# Altium PCB FPv1.3.2.PcbDoc (part 1 of 9)
Units mm, origin at the board's own origin, x right, y up, seen from the top; angles counter-clockwise.
Board outline 81.28 x 53.34 mm, 4 copper layers (Top Layer, GROUND PLANE, POWER PLANE, Bottom Layer); 98 components, 183 nets, 614 pads, 312 vias.
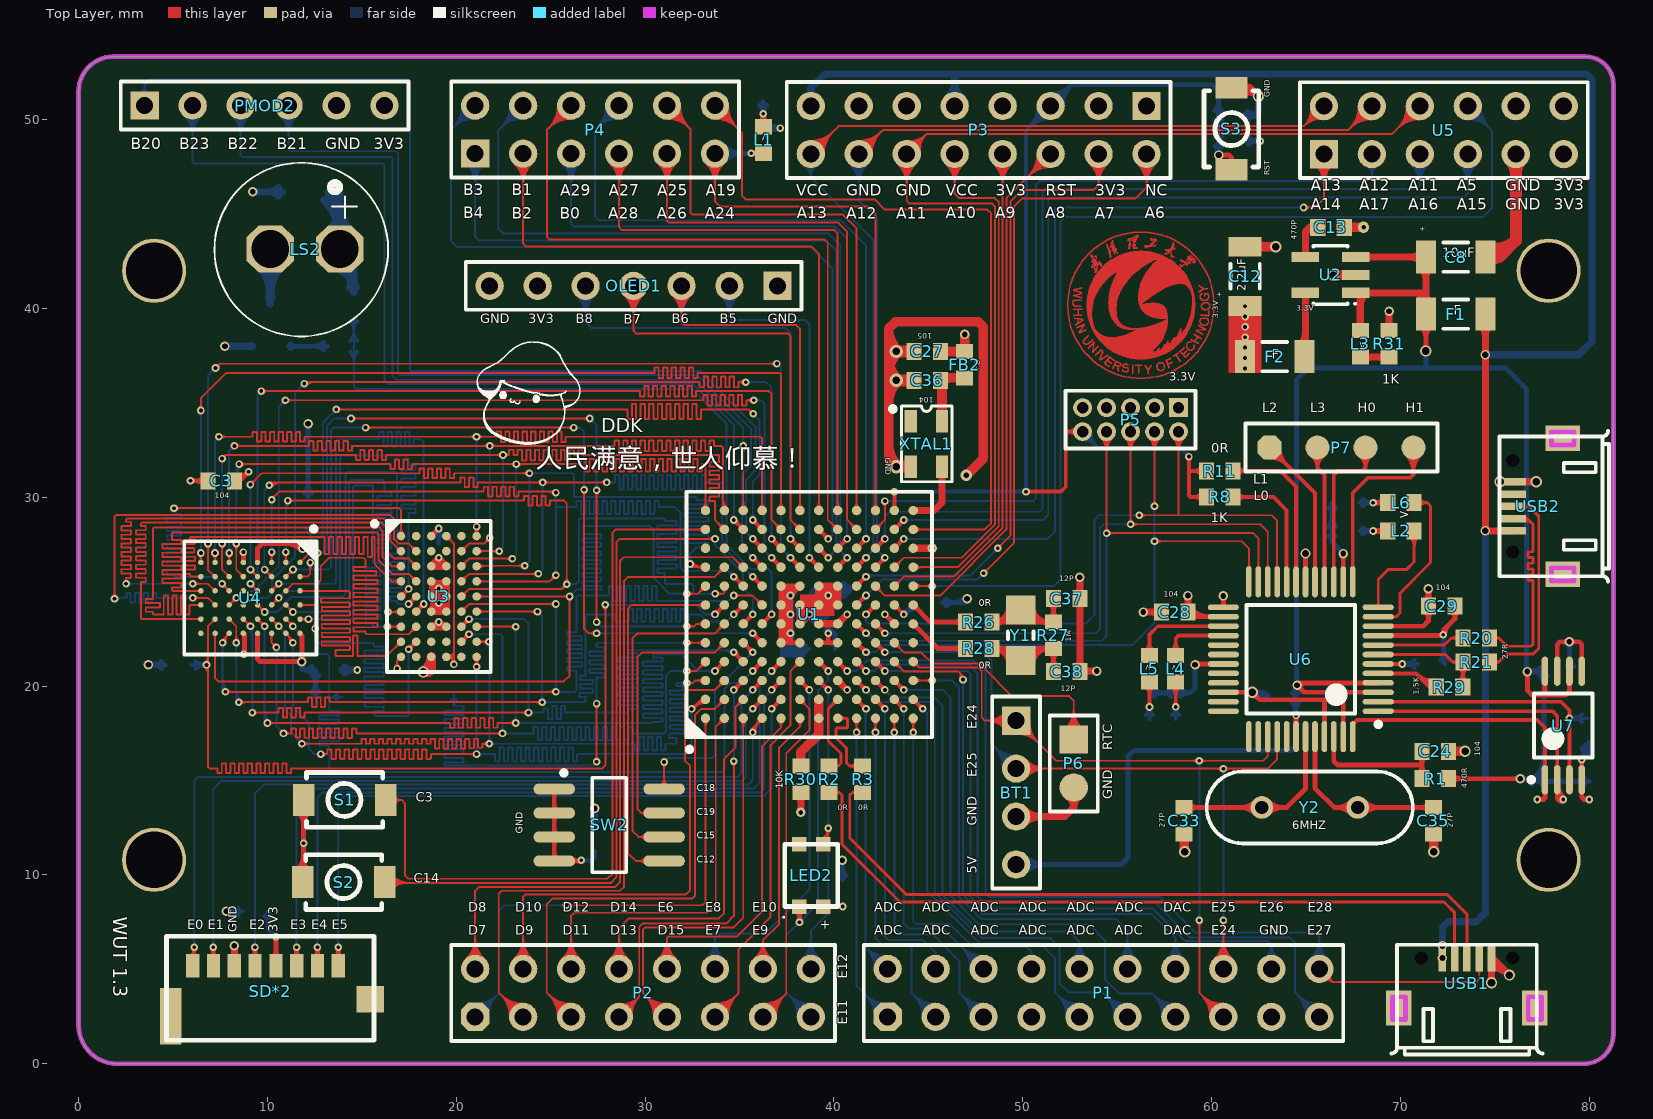
[diagram p0: Top Layer view]
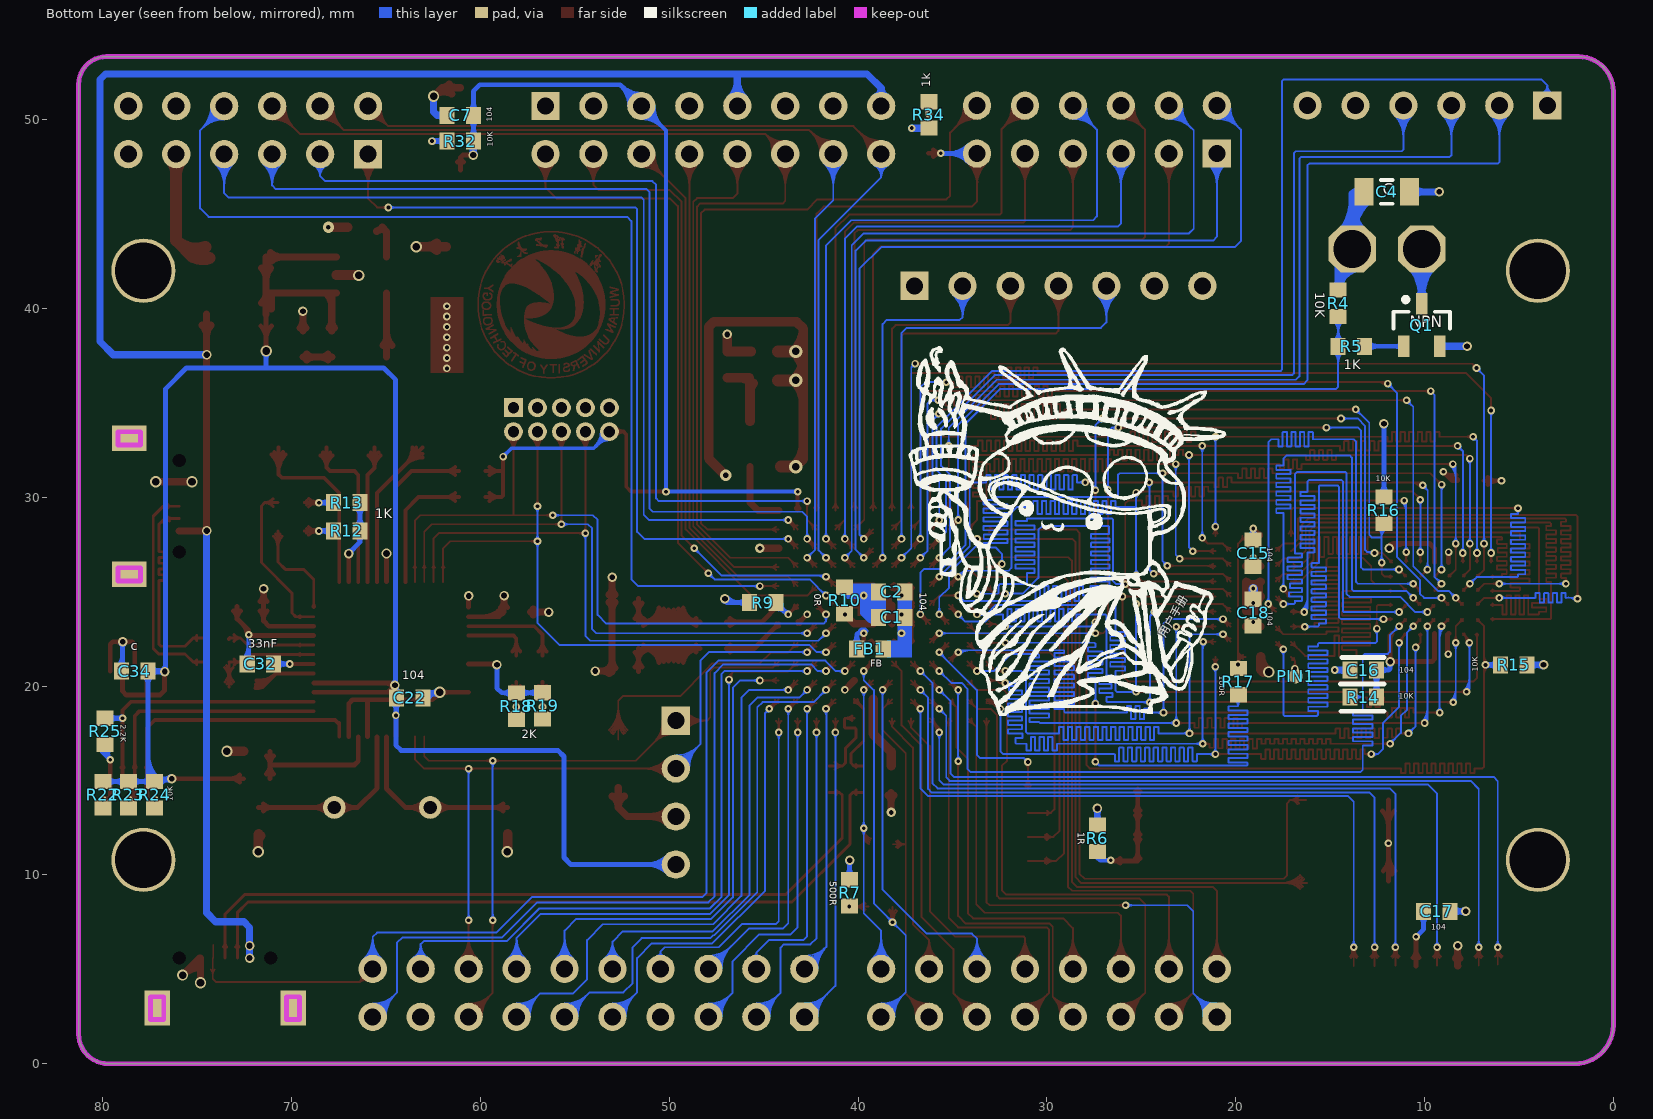
[diagram p1: Bottom Layer view, seen from below]
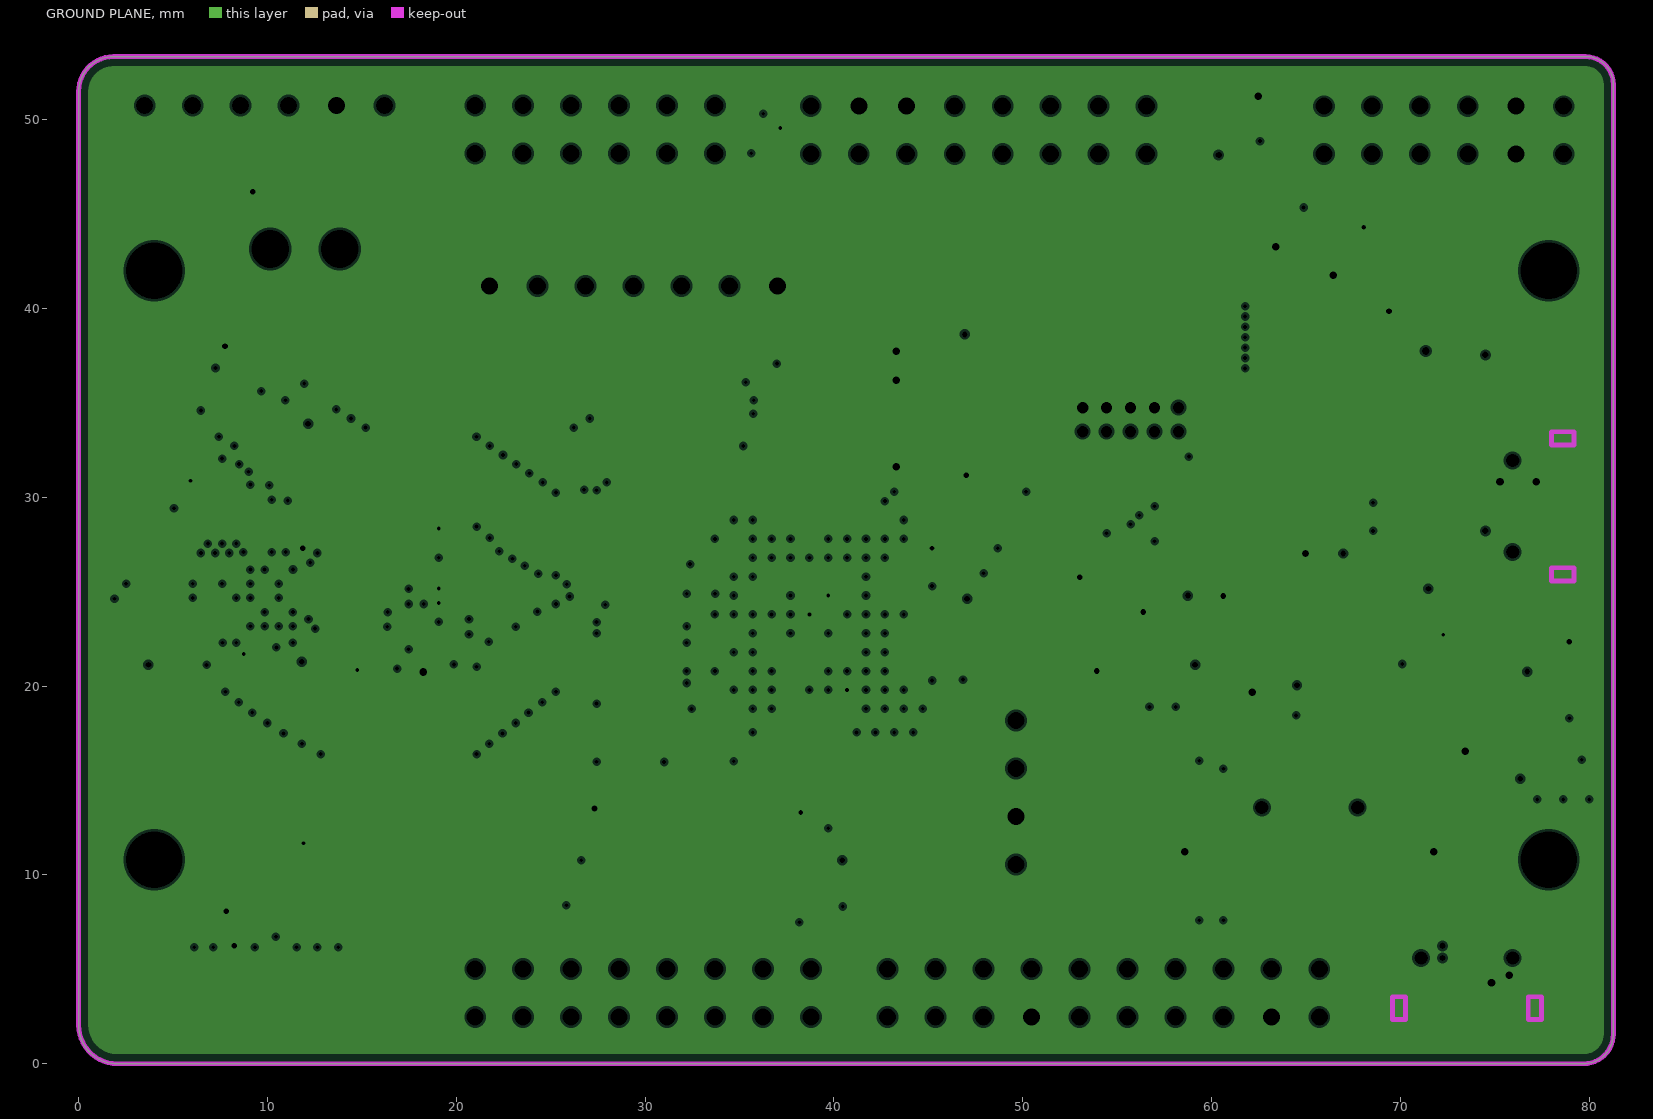
[diagram p2: GROUND PLANE, clearances drawn from the general rule]
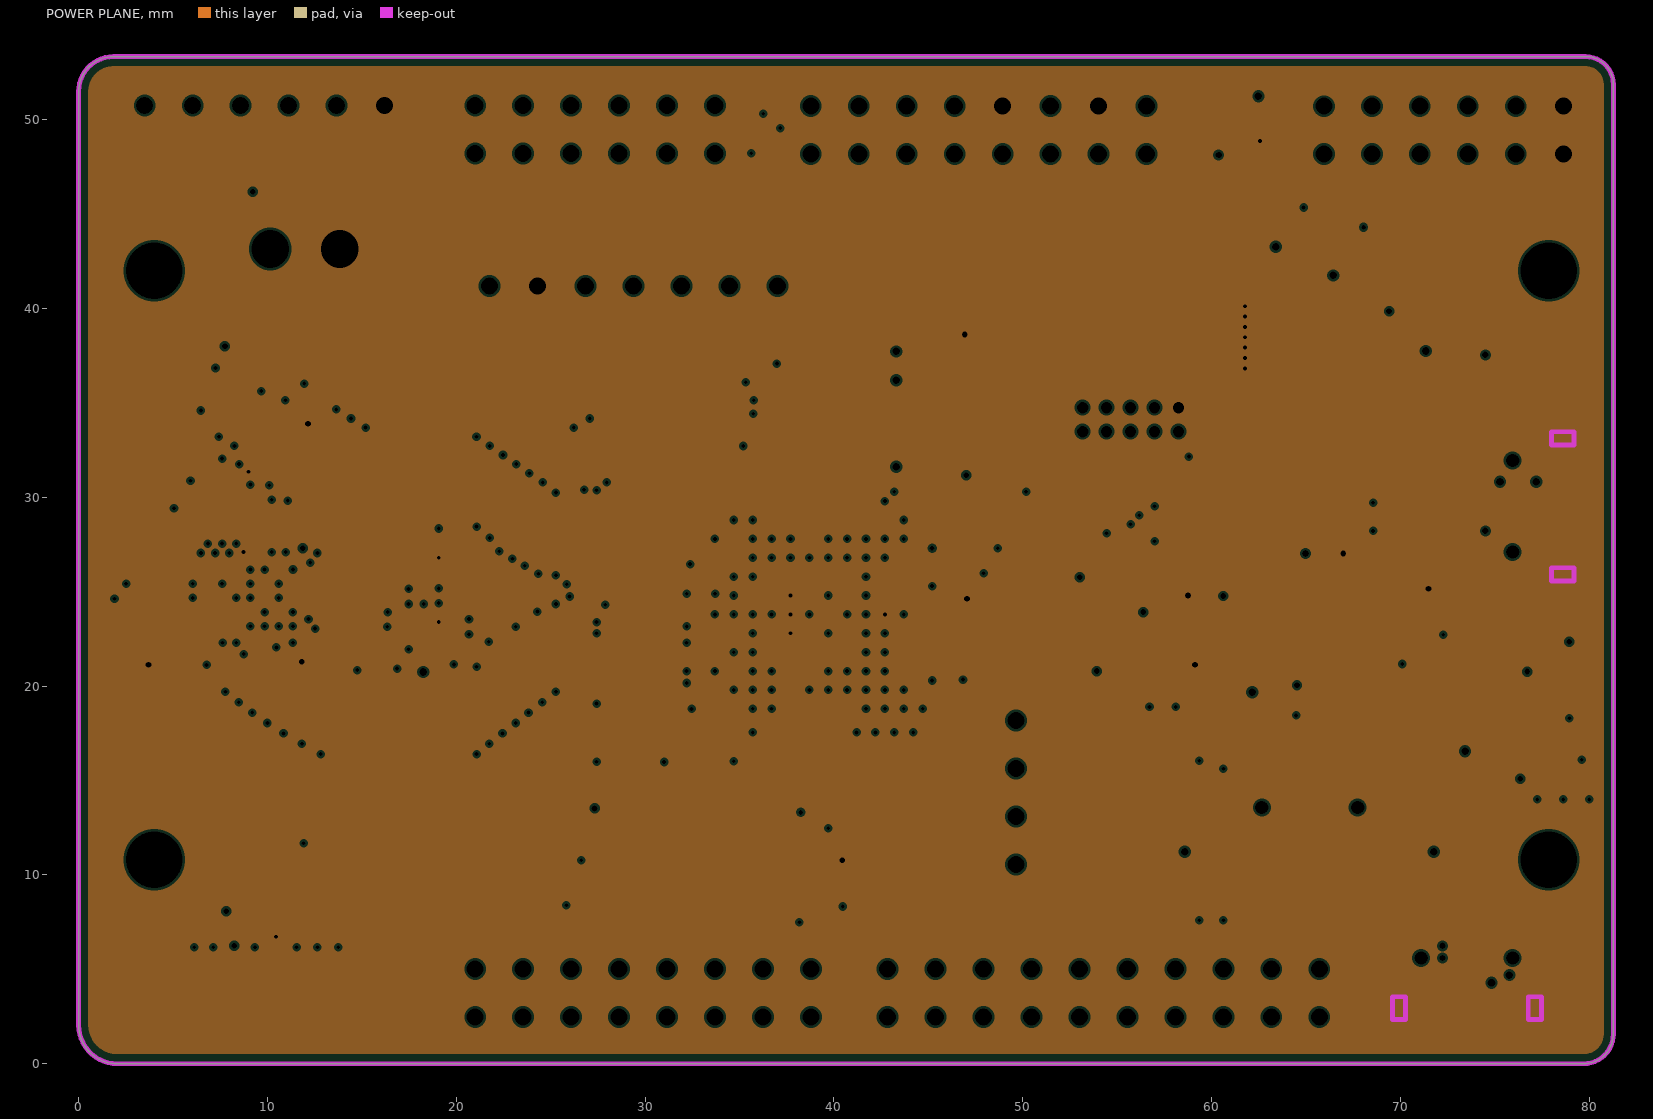
[diagram p3: POWER PLANE, clearances drawn from the general rule]

## Layer stack, top to bottom
Top Layer: signal copper 0.0356
Dielectric: prepreg 0.32, FR-4, Dk 4.8
GROUND PLANE: plane copper 0.0356, net GND
Dielectric: core 0.32, FR-4, Dk 4.8
POWER PLANE: plane copper 0.0356, net 3.3V
Dielectric: prepreg 0.32, FR-4, Dk 4.8
Bottom Layer: signal copper 0.0356

## Board outline
0,2.05 0,51.5 cw(c1.84,51.5) 1.84,53.34 79.81,53.34 cw(c79.81,51.87) 81.28,51.87 81.28,1.58 cw(c79.7,1.58) 79.7,0 2.05,0 cw(c2.05,2.05)

## Design rules (kind name [scope] priority, off if disabled: settings)
Clearance [All] p1: gap=0.102
DiffPairsRouting [All] p1: maxlimit=2.54 minlimit=0.102 mostfreqgap=0.254 bottomlayer_maxgap=1.27 maxuncoupledlength=12.7
HoleSize [All] p1: absolutevalues=TRUE maxlimit=12.7 minlimit=0.2 maxpercent=80.000 minpercent=20.000
PlaneClearance [All] p1: clearance=0.127
PlaneConnect PlaneConnect_1 [All] p1: planeconnectstyle=Direct reliefexpansion=0.102 reliefentries=4 reliefconductorwidth=0.152 reliefairgap=0.254
PolygonConnect [All] p1: connectstyle=Direct reliefconductorwidth=0.254 reliefentries=4 polygonreliefangle="90 Angle" airgapwidth=0.127
RoutingVias [All] p1: holewidth=0.711 width=1.27 viastyle="Through Hole" minholewidth=0.711 minwidth=1.27 maxholewidth=0.711 maxwidth=1.27
SolderMaskExpansion [All] p1: expansion=0.102
Width [All] p1: maxlimit=1.778 minlimit=0.102 preferedwidth=0.254 minimp=50.000000 maximp=50.000000 favimp=50.000000
24 further rules are at their usual default settings.

## Classes and differential pairs
net class PTC[19..12]: PTC3 PTC12 PTC13 PTC14 PTC15 PTC18 PTC19
net class PTD[15..7]: PTD7 PTD8 PTD9 PTD10 PTD11 PTD12 PTD13 PTD14 PTD15
net class PTB[23..0]: PTB0 PTB1 PTB2 PTB3 PTB4 PTB5 PTB6 PTB7 PTB8 PTB20 PTB21 PTB22 PTB23
net class PTA[29..11]: PTA4 PTA5 PTA11 PTA12 PTA13 PTA14 PTA15 PTA16 PTA17 PTA24 PTA25 PTA26 PTA27 PTA28 PTA29
net class FTM3_CH[7..1]: FTM3_CH1 FTM3_CH2 FTM3_CH3 FTM3_CH4 FTM3_CH5 FTM3_CH6 FTM3_CH7
net class ANALOG[13..1]: ANALOG1 ANALOG2 ANALOG3 ANALOG4 ANALOG5 ANALOG6 ANALOG7 ANALOG8 ANALOG9 ANALOG10 ANALOG11 ANALOG12 ANALOG13
from-to class SRAM_DATA: AD0(U1-B2:U4-B6) AD1(U1-A2:U4-C5) AD2(U1-A3:U4-C6) AD3(U1-B3:U4-D5) AD4(U1-C3:U4-E5) AD5(U1-C6:U4-F5) AD6(U1-D6:U4-F6) AD7(U1-A7:U4-G6) AD8(U1-B7:U4-B1) AD9(U1-C7:U4-C1) AD10(U1-D7:U4-C2) AD11(U1-A8:U4-D2) AD12(U1-C8:U4-E2) AD13(U1-D8:U4-F2) AD14(U1-B9:U4-F1) AD15(U1-D9:U4-G1) "AD16 (U1-E9 : U4-F4)" AD17(U1-B10:U4-E4) AD18(U1-C10:U4-D3) AD19(U1-D10:U4-H1) AD20(U1-E10:U4-G2)
component class MCU_K64FX: C1 C2 C3 C7 C27 C36 C37 C38 FB1 FB2 P5 P6 R9 R10 R26 R27 R28 R30 R32 S1 S2 S3 U1 XTAL1 Y1
component class Memory: C15 C16 C17 C18 PIN1 R14 R15 R16 R17 U3 U4
component class power_manage: C8 C12 C13 F1 F2 L3 R31 U2
component class protocol1: BT1 C4 L1 LED2 LS2 OLED1 P1 P2 P3 P4 PMOD2 Q1 R2 R3 R4 R5 R6 R7 R34 SD*2 SW2 U5 USB1
component class protocol2: C22 C24 C28 C29 C32 C33 C34 C35 L2 L4 L5 L6 P7 R1 R8 R11 R12 R13 R18 R19 R20 R21 R22 R23 R24 R25 R29 U6 U7 USB2 Y2
net class AD[20..0]: AD0 AD1 AD2 AD3 AD4 AD5 AD6 AD7 AD8 AD9 AD10 AD11 AD12 AD13 AD14 AD15 AD16 AD17 AD18 AD19 AD20
net class PTE[0..28]: PTE0 PTE1 PTE2 PTE3 PTE4 PTE5 PTE24 PTE25 PTE26 PTE27 PTE28
differential pair USB0D: +USB0D_P -USB0D_N
differential pair USB1D: +USB1D_P -USB1D_N
differential pair USBPD: +USBPD_P -USBPD_N
differential pair USB0R: +USB0R_P -USB0R_N

## Components (designator, comment, footprint, x,y, rotation, side; value= is the part's Value field where it differs from the comment)
BT1 "Header 4" HDR1X4#1 49.65,18.175 r270 top
C1 "Cap" 1608[0603] 38.227,23.647 r180 bottom
C2 "Cap" 1608[0603] 38.227,24.994 r180 bottom
C3 "Cap" 1608[0603] 7.55,30.875 r0 top
C4 "Cap" C2012 12,46.175 r0 bottom
C7 "Cap" 1608[0603] 61.075,50.225 r180 bottom
C8 "Cap Pol1" 1206(2) 72.925,42.725 r0 top
C12 "Cap Pol1" 1206(2) 61.775,41.7 r90 top
C13 "Cap" 1608[0603] 66.325,44.3 r180 top
C15 "Cap" 1608[0603] 19.075,27.05 r270 bottom
C16 "Cap" 1608[0603] 13.25,20.85 r180 bottom
C17 "Cap" 1608[0603] 9.35,8.075 r0 bottom
C18 "Cap" 1608[0603] 19.075,23.9 r270 bottom
C22 "Cap" 1608[0603] 63.75,19.375 r0 bottom
C24 "Cap" 1608[0603] 71.85,16.55 r0 top
C27 "Cap" 1608[0603] 44.95,37.725 r0 top
C28 "Cap" 1608[0603] 58.05,23.925 r0 top
C29 "Cap" 1608[0603] 72.187,24.236 r180 top
C32 "Cap" 1608[0603] 71.65,21.175 r0 bottom
C33 "Cap" 1608[0603] 58.55,12.875 r90 top
C34 "Cap" 1608[0603] 78.304,20.791 r180 bottom
C35 "Cap" 1608[0603] 71.75,12.875 r270 top
C36 "Cap" 1608[0603] 44.95,36.2 r0 top
C37 "Cap" 1608[0603] 52.325,24.64 r180 top
C38 "Cap" 1608[0603] 52.325,20.765 r180 top
F1 "300-500mA" 1206(2) 72.925,39.7 r180 top
F2 "300-500mA" 1206(2) 63.35,37.45 r180 top
FB1 "Inductor" 1608[0603] 39.37,21.971 r0 bottom
FB2 "Inductor" 1608[0603] 46.925,37.025 r270 top
L1 "LED" 1608[0603] 36.275,48.925 r90 top
L2 "LED" 1608[0603] 70.028,28.219 r0 top
L3 "LED" 1608[0603] 67.875,38.125 r270 top
L4 "LED" 1608[0603] 58.1,20.925 r90 top
L5 "LED" 1608[0603] 56.709,20.929 r90 top
L6 "LED" 1608[0603] 70.028,29.718 r0 top
LED2 "RGB_LED1206" RGB 38.8,9.975 r90 top
LS2 "Bell" BZ 11.8,43.15 r270 top
OLED1 "Header 7" HDR1X7 37.008,41.199 r180 top
P1 "Header 10X2" HDR2X10 42.845,2.485 r0 top
P2 "Header 8X2" HDR2X8#1 21.001,2.485 r0 top
P3 "Header 8X2" HDR2X8#2 56.556,50.725 r180 top
P4 "Header 6X2" HDR2X6 21.001,48.205 r0 top
P5 "JTAG" MHDR2X5 58.25,34.75 r180 top
P6 "Header 2" HDR1X2 52.7,17.175 r270 top
P7 "Header 4" HDR1X4#2 63.068,32.639 r0 top
PIN1 "PIN" PIN 16.815,20.523 r180 bottom
PMOD2 "Header 6" HDR1X6 3.5,50.75 r0 top
Q1 "QNPN" SOT23_N 10.15,39.125 r90 bottom
R1 "Res" 1608[0603] 71.85,15.1 r180 top
R2 "Res" 1608[0603] 39.75,15.075 r270 top
R3 "Res" 1608[0603] 41.525,15.075 r270 top
R4 "10k" 1608[0603] 14.575,40.275 r270 bottom
R5 "Res2" 1608[0603] 13.875,38 r0 bottom
R6 "Res2" 1608[0603] 27.325,11.95 r270 bottom
R7 "Res" 1608[0603] 40.45,9.05 r90 bottom
R8 "Res" 1608[0603] 60.427,30.023 r0 top
R9 "Res" 1608[0603] 45.05,24.425 r180 bottom
R10 "Res" 1608[0603] 40.716,24.536 r270 bottom
R11 "Res" 1608[0603] 60.427,31.394 r0 top
R12 "Res" 1608[0603] 67.081,28.219 r180 bottom
R13 "Res" 1608[0603] 67.081,29.718 r180 bottom
R14 "Res" 1608[0603] 13.25,19.425 r180 bottom
R15 "Res" 1608[0603] 5.275,21.125 r180 bottom
R16 "Res" 1608[0603] 12.15,29.325 r90 bottom
R17 "Res" 1608[0603] 19.863,20.244 r90 bottom
R18 "Res" 1608[0603] 58.1,18.947 r90 bottom
R19 "Res" 1608[0603] 56.709,18.951 r90 bottom
R20 "Res" 1608[0603] 74.025,22.55 r180 top
R21 "Res" 1608[0603] 74.025,21.275 r180 top
R22 "Res" 1608[0603] 80,14.25 r270 bottom
R23 "Res" 1608[0603] 78.65,14.25 r270 bottom
R24 "Res" 1608[0603] 77.25,14.25 r270 bottom
R25 "Res" 1608[0603] 79.875,17.6 r270 bottom
R26 "Res" 1608[0603] 47.679,23.392 r180 top
R27 "Res" 1608[0603] 51.625,22.69 r270 top
R28 "Res" 1608[0603] 47.679,21.995 r180 top
R29 "Res" 1608[0603] 72.6,19.95 r180 top
R30 "Res" 1608[0603] 38.25,15.075 r90 top
R31 "Res" 1608[0603] 69.4,38.125 r270 top
R32 "Res" 1608[0603] 61.069,48.864 r180 bottom
R34 "Res" 1608[0603] 36.25,50.25 r90 bottom
S1 "SW-PB" "key 3*4*2" 14.075,13.975 r180 top
S2 "SW-PB" "key 3*4*2" 14.025,9.625 r180 top
S3 "SW-PB" "key 3*4*2" 61.05,49.5 r270 top
SD*2 "TF_card" TF卡座(短体) 4.65,1.25 r0 top
SW2 "SW DIP-4" SOIC-8 28.1,12.65 r0 top
U1 "MK64BGA144" BGA144C100P12X12_1300X1300X161 38.7,23.8 r90 top
U2 "MIC5219" SOT-23-5 66.3,41.775 r90 top
U3 "SN74LVC16373A(BGA54)" BGA54C80P6X9_550X800X120 19.075,24.75 r0 top
U4 "EM7164SU16" BGA48C75P6X8_598X698X104 9.1,24.675 r270 top
U5 "Header 6X2" HDR2X6 65.95,48.175 r0 top
U6 "FT2232D" TSQFP50P900X900X160-48N 64.725,21.425 r180 top
U7 "AT93C46D" TSOP65P640X120-8N-AT93C46D 78.629,17.916 r90 top
USB1 "USB_5line" USB-MICRO-5P-2F#1 72.225,5.6 r180 top
USB2 "USB_5line" USB-MICRO-5P-2F#2 75.95,28.225 r270 top
XTAL1 "50M有源晶体" XTAL7_3225 44.9,32.825 r270 top
Y1 "32.768kHZ" 3215 49.9,22.69 r270 top
Y2 "6MHz" XTAL-RAD-0.2 65.2,13.575 r180 top

## Footprints (in the part's own frame and the unit in brackets; to place one, negate y for a bottom-side part, rotate by r counter-clockwise, add the part's x,y. Pads: shape width x height; smd on the part's side, far side on the other; paste and mask are expansions set on the pad)
1206(2) [mm]
  rect 1.05x1.75 smd: 1(-1.575,0) 2(1.575,0)
  silkscreen extent -0.65,-0.77 0.65,0.77, body extent -1.6,-0.8 1.6,0.8, height 1.6
1608[0603] [mm] "Chip Capacitor, Body 1.6x0.8mm, IPC High Density"
  rect 0.8x0.9 smd: 1(-0.7,0) 2(0.7,0)
  body extent -0.87,-0.48 0.87,0.48, height 1.3
3215 [mm]
  rect 1.54x1.55 smd: 1(-1.335,0) 2(1.335,0)
  silkscreen extent -0.2,-0.67 0.2,0.67, body extent -1.65,-0.75 1.65,0.75, height 0.75
BGA48C75P6X8_598X698X104 [mm] "BGA, 48-Leads, Body 5.98x6.98mmx1.04mm, Pitch 0.75mm"
  round 0.29 smd: A1(-1.875,2.625) A2(-1.125,2.625) A3(-0.375,2.625) A4(0.375,2.625) A5(1.125,2.625) A6(1.875,2.625) B1(-1.875,1.875) B2(-1.125,1.875) B3(-0.375,1.875) B4(0.375,1.875) B5(1.125,1.875) B6(1.875,1.875) C1(-1.875,1.125) C2(-1.125,1.125) C3(-0.375,1.125) C4(0.375,1.125) C5(1.125,1.125) C6(1.875,1.125) D1(-1.875,0.375) D2(-1.125,0.375) D3(-0.375,0.375) D4(0.375,0.375) D5(1.125,0.375) D6(1.875,0.375) E1(-1.875,-0.375) E2(-1.125,-0.375) E3(-0.375,-0.375) E4(0.375,-0.375) E5(1.125,-0.375) E6(1.875,-0.375) F1(-1.875,-1.125) F2(-1.125,-1.125) F3(-0.375,-1.125) F4(0.375,-1.125) F5(1.125,-1.125) F6(1.875,-1.125) G1(-1.875,-1.875) G2(-1.125,-1.875) G3(-0.375,-1.875) G4(0.375,-1.875) G5(1.125,-1.875) G6(1.875,-1.875) H1(-1.875,-2.625) H2(-1.125,-2.625) H3(-0.375,-2.625) H4(0.375,-2.625) H5(1.125,-2.625) H6(1.875,-2.625)
  silkscreen extent -3.77,-3.5 3,3.5, body extent -2.99,-3.49 2.99,3.49, height 1.04
BGA54C80P6X9_550X800X120 [mm] "BGA, 54-Leads, Body 5.50x8.00mmx1.20mm, Pitch 0.80mm"
  round 0.45 smd: A1(-2,3.2) A2(-1.2,3.2) A3(-0.4,3.2) A4(0.4,3.2) A5(1.2,3.2) A6(2,3.2) B1(-2,2.4) B2(-1.2,2.4) B3(-0.4,2.4) B4(0.4,2.4) B5(1.2,2.4) B6(2,2.4) C1(-2,1.6) C2(-1.2,1.6) C3(-0.4,1.6) C4(0.4,1.6) C5(1.2,1.6) C6(2,1.6) D1(-2,0.8) D2(-1.2,0.8) D3(-0.4,0.8) D4(0.4,0.8) D5(1.2,0.8) D6(2,0.8) E1(-2,0) E2(-1.2,0) E3(-0.4,0) E4(0.4,0) E5(1.2,0) E6(2,0) F1(-2,-0.8) F2(-1.2,-0.8) F3(-0.4,-0.8) F4(0.4,-0.8) F5(1.2,-0.8) F6(2,-0.8) G1(-2,-1.6) G2(-1.2,-1.6) G3(-0.4,-1.6) G4(0.4,-1.6) G5(1.2,-1.6) G6(2,-1.6) H1(-2,-2.4) H2(-1.2,-2.4) H3(-0.4,-2.4) H4(0.4,-2.4) H5(1.2,-2.4) H6(2,-2.4) J1(-2,-3.2) J2(-1.2,-3.2) J3(-0.4,-3.2) J4(0.4,-3.2) J5(1.2,-3.2) J6(2,-3.2)
  silkscreen extent -3.52,-4 2.75,4, body extent -2.75,-4 2.75,4, height 1.2
BGA144C100P12X12_1300X1300X161 [mm] "BGA, 144-Leads, Body 13.00x13.00mmx1.61mm, Pitch 1.00mm"
  round 0.5 smd: A1(-5.5,5.5) A2(-4.5,5.5) A3(-3.5,5.5) A4(-2.5,5.5) A5(-1.5,5.5) A6(-0.5,5.5) A7(0.5,5.5) A8(1.5,5.5) A9(2.5,5.5) A10(3.5,5.5) A11(4.5,5.5) A12(5.5,5.5) B1(-5.5,4.5) B2(-4.5,4.5) B3(-3.5,4.5) B4(-2.5,4.5) B5(-1.5,4.5) B6(-0.5,4.5) B7(0.5,4.5) B8(1.5,4.5) B9(2.5,4.5) B10(3.5,4.5) B11(4.5,4.5) B12(5.5,4.5) C1(-5.5,3.5) C2(-4.5,3.5) C3(-3.5,3.5) C4(-2.5,3.5) C5(-1.5,3.5) C6(-0.5,3.5) C7(0.5,3.5) C8(1.5,3.5) C9(2.5,3.5) C10(3.5,3.5) C11(4.5,3.5) C12(5.5,3.5) D1(-5.5,2.5) D2(-4.5,2.5) D3(-3.5,2.5) D4(-2.5,2.5) D5(-1.5,2.5) D6(-0.5,2.5) D7(0.5,2.5) D8(1.5,2.5) D9(2.5,2.5) D10(3.5,2.5) D11(4.5,2.5) D12(5.5,2.5) E1(-5.5,1.5) E2(-4.5,1.5) E3(-3.5,1.5) E4(-2.5,1.5) E5(-1.5,1.5) E6(-0.5,1.5) E7(0.5,1.5) E8(1.5,1.5) E9(2.5,1.5) E10(3.5,1.5) E11(4.5,1.5) E12(5.5,1.5) F1(-5.5,0.5) F2(-4.5,0.5) F3(-3.5,0.5) F4(-2.5,0.5) F5(-1.5,0.5) F6(-0.5,0.5) F7(0.5,0.5) F8(1.5,0.5) F9(2.5,0.5) F10(3.5,0.5) F11(4.5,0.5) F12(5.5,0.5) G1(-5.5,-0.5) G2(-4.5,-0.5) G3(-3.5,-0.5) G4(-2.5,-0.5) G5(-1.5,-0.5) G6(-0.5,-0.5) G7(0.5,-0.5) G8(1.5,-0.5) G9(2.5,-0.5) G10(3.5,-0.5) G11(4.5,-0.5) G12(5.5,-0.5) H1(-5.5,-1.5) H2(-4.5,-1.5) H3(-3.5,-1.5) H4(-2.5,-1.5) H5(-1.5,-1.5) H6(-0.5,-1.5) H7(0.5,-1.5) H8(1.5,-1.5) H9(2.5,-1.5) H10(3.5,-1.5) H11(4.5,-1.5) H12(5.5,-1.5) J1(-5.5,-2.5) J2(-4.5,-2.5) J3(-3.5,-2.5) J4(-2.5,-2.5) J5(-1.5,-2.5) J6(-0.5,-2.5) J7(0.5,-2.5) J8(1.5,-2.5) J9(2.5,-2.5) J10(3.5,-2.5) J11(4.5,-2.5) J12(5.5,-2.5) K1(-5.5,-3.5) K2(-4.5,-3.5) K3(-3.5,-3.5) K4(-2.5,-3.5) K5(-1.5,-3.5) K6(-0.5,-3.5) K7(0.5,-3.5) K8(1.5,-3.5) K9(2.5,-3.5) K10(3.5,-3.5) K11(4.5,-3.5) K12(5.5,-3.5) L1(-5.5,-4.5) L2(-4.5,-4.5) L3(-3.5,-4.5) L4(-2.5,-4.5) L5(-1.5,-4.5) L6(-0.5,-4.5) L7(0.5,-4.5) L8(1.5,-4.5) L9(2.5,-4.5) L10(3.5,-4.5) L11(4.5,-4.5) L12(5.5,-4.5) M1(-5.5,-5.5) M2(-4.5,-5.5) M3(-3.5,-5.5) M4(-2.5,-5.5) M5(-1.5,-5.5) M6(-0.5,-5.5) M7(0.5,-5.5) M8(1.5,-5.5) M9(2.5,-5.5) M10(3.5,-5.5) M11(4.5,-5.5) M12(5.5,-5.5)
  silkscreen extent -7.27,-6.5 6.5,6.5, body extent -6.5,-6.5 6.5,6.5, height 1.61
BZ [mm]
  oct 2.5x2.5 hole 2: 1(0,2.032) 2(0,-1.651)
  silkscreen extent -4.57,-4.61 4.62,4.59
C2012 [mm] "Chip Capacitor, 2-Leads, Body 2.0x1.2mm, IPC Low Density"
  rect 1x1.45 smd: 1(-1.2,0) 2(1.2,0)
  silkscreen extent -0.3,-0.63 0.3,0.63, body extent -0.98,-0.6 1.02,0.6, height 0.5
HDR1X2 [mm] "Connector; Header; 2 Position"
  rect 1.5x1.5 smd: 1(0,0)
  round 1.5 smd: 2(2.54,0)
  silkscreen extent -1.27,-1.27 3.81,1.27
HDR1X4#1 [mm] "Connector; Header; 4 Position"
  rect 1.5x1.5 hole 0.9: 1(0,0)
  round 1.5 hole 0.9: 2(2.54,0) 3(5.08,0) 4(7.62,0)
  silkscreen extent -1.27,-1.27 8.89,1.27
HDR1X4#2 [mm] "Connector; Header; 4 Position"
  oct 1.27x1.27 smd: 1(0,0)
  round 1.27 smd: 2(2.54,0) 3(5.08,0) 4(7.62,0)
  silkscreen extent -1.27,-1.27 8.89,1.27
HDR1X6 [mm] "Connector; Header; 6 Position"
  rect 1.5x1.5 hole 0.9: 1(0,0)
  round 1.5 hole 0.9: 2(2.54,0) 3(5.08,0) 4(7.62,0) 5(10.16,0) 6(12.7,0)
  silkscreen extent -1.27,-1.27 13.97,1.27, body extent -1.27,-1.27 13.97,1.27, height 7.58
HDR1X7 [mm] "Connector; Header; 7 Position"
  rect 1.5x1.5 hole 0.9: 1(0,0)
  round 1.5 hole 0.9: 2(2.54,0) 3(5.08,0) 4(7.62,0) 5(10.16,0) 6(12.7,0) 7(15.24,0)
  silkscreen extent -1.27,-1.27 16.51,1.27
HDR2X6 [mm] "Connector; Header; 6x2 Position"
  rect 1.5x1.5 hole 0.9: 1(0,0)
  round 1.5 hole 0.9: 2(0,2.54) 3(2.54,0) 4(2.54,2.54) 5(5.08,0) 6(5.08,2.54) 7(7.62,0) 8(7.62,2.54) 9(10.16,0) 10(10.16,2.54) 11(12.7,0) 12(12.7,2.54)
  silkscreen extent -1.27,-1.27 13.97,3.81, body extent -1.27,-1.27 13.97,3.81, height 7.58
HDR2X8#1 [mm] "Connector; Header; 8x2 Position"
  oct 1.5x1.5 hole 0.9: 1(0,0)
  round 1.5 hole 0.9: 2(0,2.54) 3(2.54,0) 4(2.54,2.54) 5(5.08,0) 6(5.08,2.54) 7(7.62,0) 8(7.62,2.54) 9(10.16,0) 10(10.16,2.54) 11(12.7,0) 12(12.7,2.54) 13(15.24,0) 14(15.24,2.54) 15(17.78,0) 16(17.78,2.54)
  silkscreen extent -1.27,-1.27 19.05,3.81, body extent -1.27,-1.27 19.05,3.81, height 7.58
HDR2X8#2 [mm] "Connector; Header; 8x2 Position"
  rect 1.5x1.5 hole 0.9: 1(0,0)
  round 1.5 hole 0.9: 2(0,2.54) 3(2.54,0) 4(2.54,2.54) 5(5.08,0) 6(5.08,2.54) 7(7.62,0) 8(7.62,2.54) 9(10.16,0) 10(10.16,2.54) 11(12.7,0) 12(12.7,2.54) 13(15.24,0) 14(15.24,2.54) 15(17.78,0) 16(17.78,2.54)
  silkscreen extent -1.27,-1.27 19.05,3.81, body extent -1.27,-1.27 19.05,3.81, height 7.58
HDR2X10 [mm] "Connector; Header; 10x2 Position"
  oct 1.5x1.5 hole 0.9: 1(0,0)
  round 1.5 hole 0.9: 2(0,2.54) 3(2.54,0) 4(2.54,2.54) 5(5.08,0) 6(5.08,2.54) 7(7.62,0) 8(7.62,2.54) 9(10.16,0) 10(10.16,2.54) 11(12.7,0) 12(12.7,2.54) 13(15.24,0) 14(15.24,2.54) 15(17.78,0) 16(17.78,2.54) 17(20.32,0) 18(20.32,2.54) 19(22.86,0) 20(22.86,2.54)
  silkscreen extent -1.27,-1.27 24.13,3.81, body extent -1.27,-1.27 24.13,3.81, height 7.58
"key 3*4*2" [mm]
  rect 1.15x1.7 smd: 1(-2.191,0) 2(2.159,0)
  silkscreen extent -2.03,-1.45 2,1.45
MHDR2X5 [mm] "Connector; Header; 5x2 Position"
  rect 1x1 hole 0.6: 1(0,0)
  round 1 hole 0.6: 2(0,1.27) 3(1.27,0) 4(1.27,1.27) 5(2.54,0) 6(2.54,1.27) 7(3.81,0) 8(3.81,1.27) 9(5.08,0) 10(5.08,1.27)
  silkscreen extent -0.9,-0.9 5.98,2.17
PIN [mil]
  round 30 smd: 1(0,0)
RGB [mil]
  rect 30x30 smd: 1(-65,25) 2(-65,-25) 3(65,-25) 4(65,25)
  silkscreen extent -90,-55 65,60
SOIC-8 [mm] "IOS1540\1"
  oval 2.2x0.6 smd: 1(-2.908,1.905) 2(-2.908,0.635) 3(-2.908,-0.635) 4(-2.908,-1.905) 5(2.908,-1.905) 6(2.908,-0.635) 7(2.908,0.635) 8(2.908,1.905)
  silkscreen extent -2.52,-2.5 0.9,2.88, body extent -2,-2.5 2,2.5, height 1.75
SOT23_N [mm] "SOT23, 3-Leads, Body 2.9x1.3mm, Pitch 0.95mm, Lead Span 2.3mm - Reverse Pinning, IPC Medium Density"
  rect 1.15x0.6 smd: 1(1.125,0) 2(-1.125,-0.95) 3(-1.125,0.95)
  silkscreen extent -0.2,-1.5 1.47,1.5, body extent -0.7,-1.5 0.7,1.5, height 1.1
SOT-23-5 [mm] "SOT-23/SC-74A; 5 Leads; Body 3.1 x 3 mm, inc. leads (LxW max)"
  rect 0.55x1.45 smd: 1(-0.95,-1.329) 2(0,-1.329) 3(0.95,-1.329) 4(0.95,1.329) 5(-0.95,1.329)
  silkscreen extent -1.57,-1.35 1.55,0.9
TF卡座(短体) [mm]
  rect 1.15x3 smd: 0(0.227,1.27)
  rect 1.48x1.4 smd: 0(10.795,2.159)
  rect 0.7x1.25 smd: 1(9.097,3.937) 2(7.997,3.937) 3(6.897,3.937) 4(5.797,3.937) 5(4.697,3.937) 6(3.597,3.937) 7(2.497,3.937) 8(1.397,3.937)
  silkscreen extent 0,0 11,5.5
TSOP65P640X120-8N-AT93C46D [mm] "TSOP, 8-Leads, Body 3.00x4.40mm, Pitch 0.65mm, IPC Medium Density"
  oval 1.55x0.35 smd: 1(-2.875,0.975) 2(-2.875,0.325) 3(-2.875,-0.325) 4(-2.875,-0.975) 5(2.875,-0.975) 6(2.875,-0.325) 7(2.875,0.325) 8(2.875,0.975)
  silkscreen extent -3,-1.55 1.7,1.82, body extent -2.25,-1.55 2.25,1.55, height 1.2
TSQFP50P900X900X160-48N [mm] "TSQFP, 48-Leads,FTDI FT2232D"
  oval 1.65x0.3 smd: 1(-4.1,2.75) 2(-4.1,2.25) 3(-4.1,1.75) 4(-4.1,1.25) 5(-4.1,0.75) 6(-4.1,0.25) 7(-4.1,-0.25) 8(-4.1,-0.75) 9(-4.1,-1.25) 10(-4.1,-1.75) 11(-4.1,-2.25) 12(-4.1,-2.75) 25(4.1,-2.75) 26(4.1,-2.25) 27(4.1,-1.75) 28(4.1,-1.25) 29(4.1,-0.75) 30(4.1,-0.25) 31(4.1,0.25) 32(4.1,0.75) 33(4.1,1.25) 34(4.1,1.75) 35(4.1,2.25) 36(4.1,2.75)
  oval 0.3x1.65 smd: 13(-2.75,-4.1) 14(-2.25,-4.1) 15(-1.75,-4.1) 16(-1.25,-4.1) 17(-0.75,-4.1) 18(-0.25,-4.1) 19(0.25,-4.1) 20(0.75,-4.1) 21(1.25,-4.1) 22(1.75,-4.1) 23(2.25,-4.1) 24(2.75,-4.1) 37(2.75,4.1) 38(2.25,4.1) 39(1.75,4.1) 40(1.25,4.1) 41(0.75,4.1) 42(0.25,4.1) 43(-0.25,4.1) 44(-0.75,4.1) 45(-1.25,4.1) 46(-1.75,4.1) 47(-2.25,4.1) 48(-2.75,4.1)
  silkscreen extent -4.23,-2.88 2.88,3.57, body extent -3.5,-3.5 3.5,3.5, height 1.6
USB-MICRO-5P-2F#1 [mm]
  round 0 hole 0.7: 0(-3.725,0) 0(1.125,0)
  rect 0.4x1.4 smd: 1(0,0) 2(-0.65,0) 3(-1.3,0) 4(-1.95,0) 5(-2.6,0)
  rect 1.35x1.85 all layers, no hole: 6(2.3,2.65) 7(-4.9,2.65)
  Keep-Out Layer lines w0.254: 2.65,3.25 2.65,2.05 1.95,2.05 1.95,3.25 2.65,3.25 ; -4.55,3.25 -5.25,3.25 -5.25,2.05 -4.55,2.05 -4.55,3.25
  silkscreen extent -5.3,-0.7 2.7,5.1
USB-MICRO-5P-2F#2 [mm]
  round 0 hole 0.7 mask+0.051: 0(-3.725,0) 0(1.125,0)
  rect 0.4x1.4 smd: 1(0,0) 2(-0.65,0) 3(-1.3,0) 4(-1.95,0) 5(-2.6,0)
  rect 1.35x1.85 all layers, no hole: 6(2.3,2.65) 7(-4.9,2.65)
  Keep-Out Layer lines w0.254: 2.65,2.05 2.65,3.25 1.95,3.25 1.95,2.05 2.65,2.05 ; -4.55,2.05 -5.25,2.05 -5.25,3.25 -4.55,3.25 -4.55,2.05
  silkscreen extent -5.3,-0.7 2.7,5.1
XTAL7_3225 [mil]
  rect 47.2x25.6 smd: 1(-47.25,-32.5) 2(47.25,-32.5) 3(47.25,32.5) 4(-47.25,32.5)
  silkscreen extent -79,-75 79,53
XTAL-RAD-0.2 [mm] "Radial Cap, Thru-Hole; 2 Leads; 0.2 in Pin Spacing"
  round 1.2 hole 0.7: 1(-2.54,0) 2(2.54,0)
  silkscreen extent -5.46,-1.91 5.46,1.91, body extent -5.33,-2.05 5.33,2.05, height 3.22

## Part data
BT1 P7: "Header, 4-Pin"
C1 C2 C3 C7 C13 C15 C16 C17 C18 C22 C24 C27 C28 C29 C32 C33 C34 C35 C36 C37 C38: "贴片电容"
C4: "Capacitor"
C8 C12: "Polarized Capacitor (Radial)"
F1 F2: library part "Fuse 1", "Fuse"
LS2: "Electrical Bell"
OLED1: "Header, 7-Pin"
P1: "Header, 10-Pin, Dual row"
P2 P3: "Header, 8-Pin, Dual row"
P4 U5: "Header, 6-Pin, Dual row"
P5: library part "Header 5X2", "Header, 5-Pin, Dual row"
P6: "Header, 2-Pin"
PMOD2: "Header, 6-Pin"
Q1: "NPN Bipolar Transistor"
R1 R2 R3 R7 R8 R9 R10 R11 R12 R13 R14 R15 R16 R17 R18 R19 R20 R21 R22 R23 R24 R25 R26 R27 R28 R29 R30 R31 R32 R34: "贴片电阻"
R4: library part Res, "Resistor of led"
R5 R6: "Resistor"
S1 S2 S3: "Switch"
SW2: "DIP Switch, 4 Position, SPST"
U2: "LDO"
XTAL1: library part 有源晶体
Y1 Y2: library part XTAL, "晶体振荡器"

## Free pads (board coordinates)
  round 3.4 hole 3: 0(77.85,10.8) 1(4,10.8) 2(4,42) 3(77.85,42)

## Via types
v1: diameter 0.403, hole 0.2, Top Layer to Bottom Layer, tented both sides, 261 vias
v2: diameter 0.503, hole 0.3, Top Layer to Bottom Layer, tented both sides, 25 vias
v3: diameter 0.6, hole 0.4, Top Layer to Bottom Layer, tented both sides, 11 vias
v4: diameter 0.508, hole 0.33, Top Layer to Bottom Layer, tented both sides, 5 vias
v5: diameter 0.703, hole 0.4, Top Layer to Bottom Layer, tented both sides, 3 vias
v6: diameter 0.603, hole 0.4, Top Layer to Bottom Layer, tented both sides, 2 vias
v7: diameter 0.503, hole 0.25, Top Layer to Bottom Layer, tented both sides, 2 vias
v8: diameter 0.6, hole 0.24, Top Layer to Bottom Layer, tented both sides, 1 vias
v9: diameter 0.508, hole 0.349, Top Layer to Bottom Layer, tented both sides, 1 vias
v10: diameter 0.603, hole 0.3, Top Layer to Bottom Layer, tented both sides, 1 vias

## Nets (pads, with @x,y where several pads share a name; then routed paths per layer and width w, separated by ;. In a path a pad name is that pad's centre, name@x,y a point inside that pad or via, vN(x,y) a via of type N, cw(c..) or ccw(c..) an arc to the next point about the centre after c; other vN are vias at no path point)
3.3V: C1.2 C2.2 C3.2 C4.2 C12.1 C15.2 C16.2 C17.2 C18.2 C27.2 C28.2 C29.2 F2.2 FB1.1 FB2.1 LS2.1 OLED1.6 P3.3 P3.7 P5.1 PMOD2.6 R4.1 R7.2 R9.1 R12.2 R13.2 R14.2 R15.2 R16.2 R18.2 R19.2 R32.1 SD*2.4 U1.E5 U1.E6 U1.E7 U1.E8 U1.F5 U1.F8 U1.L6 U3.C3 U3.C4 U3.G3 U3.G4 U4.A6 U4.D6 U4.E1 U5.11 U5.12 U6.10 U6.14 U6.26 U6.31 | length 134.5
  Top Layer w0.254: C3.2@8.25,30.875 8.525,30.875 v1(9,31.35) cw(c8.53,31.82) C3.2@8.331,31.186 ; C3.2@8.256,30.943 ccw(c8.389,31.368) 8.703,31.053 ; U4.E1@8.725,26.55 v1(8.725,27.1) ; U4.D6@9.475,22.8 9.475,21.425 9.6,21.3 v2(11.825,21.3) 11.825,22.7 U4.A6@11.725,22.8 ; SD*2.4@10.289,5.62 ccw(c9.909,6) 10.447,6 ccw(c10.985,6) SD*2.4@10.605,5.62 ; SD*2.4@10.447,5.187 v1@10.447,6.722 ; U4.A6@11.712,22.787 cw(c11.44,22.515) 11.825,22.515 ; v2@11.737,21.212 ccw(c11.524,20.999) 11.524,21.3 ccw(c11.524,21.601) 11.737,21.388 ccw(c11.524,21.601) 11.825,21.601 ccw(c12.126,21.601) v2@11.913,21.388 ; U1.E5@37.113,22.387 ccw(c36.903,22.597) 37.2,22.597 ccw(c37.497,22.597) 37.287,22.387 ccw(c37.497,22.597) 37.497,22.3 ccw(c37.497,22.003) U1.E5@37.287,22.213 ; U1.E6@37.113,23.213 cw(c36.903,23.003) 37.2,23.003 cw(c37.497,23.003) U1.E6@37.287,23.213 ; U1.E6@37.113,23.387 ccw(c36.903,23.597) 37.2,23.597 ccw(c37.497,23.597) U1.E6@37.287,23.387 ; U1.E7@37.113,24.213 cw(c36.903,24.003) 37.2,24.003 cw(c37.497,24.003) 37.287,24.213 cw(c37.497,24.003) 37.497,24.3 cw(c37.497,24.597) 37.287,24.387 cw(c37.497,24.597) 37.2,24.597 cw(c36.903,24.597) U1.E7@37.113,24.387 ; U1.E8@37.113,25.213 cw(c36.903,25.003) 37.2,25.003 cw(c37.497,25.003) 37.287,25.213 cw(c37.497,25.003) 37.497,25.3 cw(c37.497,25.597) U1.E8@37.287,25.387 ; U1.E5@37.2,22.423 ccw(c37.2,22.72) 37.41,22.51 ccw(c37.62,22.3) U1.E5@37.323,22.3 ; U1.E6@37.2,23.177 cw(c37.2,22.88) 37.41,23.09 cw(c37.62,23.3) 37.323,23.3 cw(c37.62,23.3) 37.41,23.51 cw(c37.2,23.72) U1.E6@37.2,23.423 ; U1.E7@37.2,24.177 cw(c37.2,23.88) 37.41,24.09 cw(c37.62,24.3) 37.323,24.3 cw(c37.62,24.3) 37.41,24.51 cw(c37.2,24.72) U1.E7@37.2,24.423 ; U1.E8@37.2,25.177 cw(c37.2,24.88) 37.41,25.09 cw(c37.62,25.3) U1.E8@37.323,25.3 ; 37.21,24.8 v1(37.7,24.8) ; 37.226,23.8 v1(37.7,23.8) ; 37.692,24.3 U1.E7@37.2,24.3 ; 37.7,22.306 v1(37.7,22.8) ; U1.F8@38.077,25.3 cw(c37.78,25.3) 37.99,25.09 cw(c38.2,24.88) U1.F8@38.2,25.177 ; U1.F5@38.113,22.213 ccw(c37.903,22.003) 37.903,22.3 ccw(c37.903,22.597) U1.F5@38.113,22.387 ; U1.F8@38.113,25.213 ccw(c37.903,25.003) 37.903,25.3 ccw(c37.903,25.597) U1.F8@38.113,25.387 ; U1.F5@38.2,22.3 U1.E5@37.2,22.3 ; v1(42.7,23.8) U1.L6@43.2,23.3 ; U1.L6@43.077,23.3 ccw(c42.78,23.3) 42.99,23.51 ccw(c43.2,23.72) U1.L6@43.2,23.423 ; C28.2@58.557,24.168 ccw(c58.091,24.634) 58.75,24.634 ccw(c59.409,24.634) C28.2@58.943,24.168 ; v2@58.642,24.738 cw(c58.255,24.514) 58.687,24.398 ; v2@58.662,24.712 cw(c58.449,24.499) 58.75,24.499 cw(c59.051,24.499) v2@58.838,24.712 ; C28.2@58.75,23.925 v2(58.75,24.8) ; C28.2@58.763,23.888 ccw(c59.279,24.404) 59.279,23.675 ; 58.813,24.398 cw(c59.245,24.514) v2@58.858,24.738 ; C28.2@58.943,24.068 ccw(c59.892,25.017) U6.26@59.892,23.675 ; C28.2@59,23.675 U6.26@60.625,23.675 ; v2(59.125,21.125) 59.175,21.175 U6.31@60.625,21.175 ; v2@59.213,21.037 cw(c59.546,20.704) 59.546,21.175 ; v2@66.887,26.937 cw(c66.674,26.724) 66.975,26.724 cw(c67.276,26.724) v2@67.063,26.937 ; U6.14@66.975,25.525 v2(66.975,27.025) ; U6.10@68.825,23.175 71.206,23.175 71.487,23.456 v2(71.487,25.161) ; C29.2@71.294,23.993 cw(c70.828,23.527) 71.487,23.527 cw(c72.146,23.527) C29.2@71.68,23.993 ; C29.2@71.294,24.479 ccw(c70.828,24.945) 71.487,24.945 ccw(c72.146,24.945) C29.2@71.68,24.479 ; v2@71.38,25.099 cw(c70.954,24.853) 71.429,24.726 ; v2@71.399,25.073 cw(c71.187,24.861) 71.487,24.861 cw(c71.788,24.861) v2@71.575,25.073 ; 71.546,24.726 cw(c72.021,24.853) v2@71.595,25.099 ; U1.E5@37.2,22.3 U1.E6@37.2,23.3 ; U1.E5@37.2,22.3 v1(37.7,22.8) ; U1.E6@37.2,23.3 v1(37.7,23.8) ; U1.E6@37.2,23.3 U1.E7@37.2,24.3 ; U1.E6@37.2,23.3 v1(37.7,22.8) ; U1.E7@37.2,24.3 U1.E8@37.2,25.3 ; U1.E7@37.2,24.3 v1(37.7,23.8) ; U1.E7@37.2,24.3 v1(37.7,24.8) ; U1.E8@37.2,25.3 v1(37.7,24.8) ; U1.E8@37.2,25.3 37.643,25.3 ; 37.643,25.3 37.7,25.243 v1(37.7,24.8) ; 37.643,25.3 U1.F8@38.2,25.3 v1(37.7,24.8) ; v1(37.7,22.8) v1(37.7,23.8) ; v1(37.7,23.8) v1(37.7,24.8)
  Top Layer w0.381: U3.G3@18.675,23.184 ccw(c18.675,23.63) v1@18.99,23.315 ; v1@19.065,23.404 cw(c18.675,23.576) U3.G3@18.675,23.15 U3.G3@18.825,23.15 ; 19.075,23.176 v1(19.075,23.4) ; 19.075,26.376 v1@19.075,26.75 ; v1(19.075,26.8) v1@19.075,26.75 ; v1@19.085,23.404 ccw(c19.475,23.576) U3.G4@19.475,23.15 U3.G4@19.325,23.15 ; v1@19.16,23.315 ccw(c19.475,23.63) U3.G4@19.475,23.184 ; F2.2@61.538,38.037 ccw(c60.967,38.608) 61.775,38.608 ccw(c62.583,38.608) F2.2@62.012,38.037 ; C12.1@61.538,39.888 cw(c60.967,39.317) 61.775,39.317 cw(c62.583,39.317) C12.1@62.012,39.888 ; v1@61.682,38.343 ccw(c62.041,38.216) F2.2@61.782,37.936 ; F2.2@61.768,37.936 ccw(c61.509,38.216) v1@61.868,38.343 ; F2.2@61.775,37.45 v1(61.775,40.125) ; U3.G3@18.825,23.15 U3.G4@19.325,23.15 ; U3.G3@18.825,23.15 v1(19.075,23.4) ; v1(19.075,23.4) U3.G4@19.325,23.15 ; v1@19.075,26.75 U3.C4@19.475,26.35 U3.C3@18.675,26.35 v1@19.075,26.75
  Top Layer w0.508: C27.2@45.65,37.725 FB2.1@46.925,37.725 v2(46.925,38.625)
  Bottom Layer w0.254: v2(3.7,21.125) R15.2@4.575,21.125 ; v2@3.762,21.017 cw(c4.008,20.592) 4.135,21.066 ; v2@3.762,21.233 ccw(c4.008,21.658) 4.135,21.184 ; v2@3.788,21.037 cw(c4.001,20.824) 4.001,21.125 cw(c4.001,21.426) v2@3.788,21.213 ; R15.2@4.382,20.932 ccw(c3.916,20.466) 3.916,21.125 ccw(c3.916,21.784) R15.2@4.382,21.318 ; C17.2@9.857,7.832 cw(c9.391,7.366) 10.05,7.366 cw(c10.709,7.366) C17.2@10.243,7.832 ; C17.2@10.05,8.075 10.05,7.125 v1(10.45,6.725) ; v2@11.737,21.212 cw(c11.524,20.999) 11.825,20.999 cw(c12.126,20.999) v2@11.913,21.212 ; v2(11.825,21.3) 11.825,20.925 11.9,20.85 ; R16.2@11.957,30.218 ccw(c11.491,30.684) 12.15,30.684 ccw(c12.809,30.684) R16.2@12.343,30.218 ; v2@12.062,33.812 cw(c11.849,33.599) 12.15,33.599 cw(c12.451,33.599) v2@12.238,33.812 ; R16.2@12.15,30.025 v2(12.15,33.9) ; C16.2@12.355,20.659 ccw(c11.9,20.213) 11.9,20.85 ; C16.2@12.355,21.041 cw(c11.9,21.487) 11.9,20.85 ; R14.2@12.357,19.668 ccw(c11.891,20.134) 12.55,20.134 ccw(c13.209,20.134) R14.2@12.743,19.668 ; C16.2@12.357,20.607 cw(c11.891,20.141) 12.55,20.141 cw(c13.209,20.141) C16.2@12.743,20.607 ; R14.2@12.55,19.425 C16.2@12.55,20.85 11.9,20.85 ; v1(37.7,22.8) 37.7,22.142 37.871,21.971 FB1.1@38.67,21.971 ; FB1.1@38.477,21.778 ccw(c38.011,21.312) 38.011,21.971 ccw(c38.011,22.63) FB1.1@38.477,22.164 ; R7.2@40.257,9.943 ccw(c39.791,10.409) 40.45,10.409 ccw(c41.109,10.409) R7.2@40.643,9.943 ; v2@40.362,10.687 cw(c40.149,10.474) 40.45,10.474 cw(c40.751,10.474) v2@40.538,10.687 ; R7.2@40.45,9.75 v2(40.45,10.775) ; R9.1@45.75,24.425 46.85,24.425 v2(47.05,24.625) ; R9.1@45.943,24.232 cw(c46.409,23.766) 46.409,24.425 cw(c46.409,25.084) R9.1@45.943,24.618 ; 46.267,24.425 ccw(c46.267,25.408) v2@46.962,24.713 ; 46.88,24.425 ccw(c46.88,24.795) v2@47.142,24.533 ; R19.2@56.709,19.651 58.096,19.651 R18.2@58.1,19.647 58.872,19.647 59.125,19.9 v2(59.125,21.125) ; R19.2@56.952,19.458 cw(c57.418,18.992) 57.418,19.651 cw(c57.418,20.31) R19.2@56.952,19.844 ; 57.381,19.651 cw(c57.381,18.978) R18.2@57.857,19.454 ; 57.401,19.651 ccw(c57.401,20.296) R18.2@57.857,19.84 ; R18.2@58.343,19.454 cw(c58.809,18.988) 58.809,19.647 cw(c58.809,20.306) R18.2@58.343,19.84 ; v2@59.037,21.037 cw(c58.824,20.824) 59.125,20.824 cw(c59.426,20.824) v2@59.213,21.037 ; R32.1@61.769,48.864 v1(62.566,48.864) ; R32.1@61.962,48.671 cw(c62.428,48.205) 62.428,48.864 cw(c62.428,49.523) R32.1@61.962,49.057 ; 62.3,48.83 cw(c62.378,48.538) v1@62.529,48.799 ; 62.3,48.898 ccw(c62.378,49.19) v1@62.529,48.929 ; R12.2@66.188,28.462 ccw(c65.722,28.928) 66.381,28.928 ccw(c67.04,28.928) R12.2@66.574,28.462 ; R13.2@66.188,29.475 cw(c65.722,29.009) 66.381,29.009 cw(c67.04,29.009) R13.2@66.574,29.475 ; R12.2@66.216,27.952 cw(c65.962,27.619) 66.381,27.619 ; R13.2@66.381,29.718 R12.2@66.381,28.219 66.381,27.619 ; R12.2@66.547,27.952 ccw(c66.8,27.619) 66.381,27.619 ; v2@66.851,27.025 ccw(c66.55,27.025) 66.762,27.238 ccw(c66.975,27.45) v2@66.975,27.149 ; v2(66.975,27.025) 66.381,27.619
  Bottom Layer w0.381: C4.2@12.981,45.731 cw(c10.927,43.677) LS2.1@13.832,43.677 ; LS2.1@13.083,43.899 ccw(c11.274,45.708) 13.832,45.708 ccw(c16.39,45.708) LS2.1@14.581,43.899 ; C4.2@13.2,46.175 13.744,46.175 ; C4.2@13.251,46.001 cw(c11.847,44.597) 13.832,44.597 ; LS2.1@13.352,43.63 ccw(c12.194,44.788) 13.832,44.788 ccw(c15.47,44.788) LS2.1@14.312,43.63 ; C4.2@13.466,46.017 cw(c13.744,45.852) 13.744,46.175 ; C4.2@13.466,46.333 ccw(c13.744,46.498) 13.744,46.175 ; C4.2@13.52,46.27 cw(c12.767,45.517) 13.832,45.517 ; LS2.1@13.579,42.121 cw(c13.268,40.852) R4.1@14.575,40.852 ; LS2.1@13.67,42.491 cw(c13.387,41.337) R4.1@14.575,41.337 ; LS2.1@13.761,42.861 cw(c13.506,41.823) 14.575,41.823 ; R4.1@14.348,41.087 ccw(c13.931,41.35) 14.407,41.478 ; R4.1@14.36,41.104 ccw(c13.828,41.519) 14.48,41.694 ; 14.42,41.43 ccw(c14.855,41.546) R4.1@14.63,41.156 ; R4.1@14.427,41.123 ccw(c14.069,41.481) 14.575,41.481 ccw(c15.081,41.481) R4.1@14.723,41.123 ; R4.1@14.575,40.975 14.575,42.407 LS2.1@13.832,43.15 13.832,46.087 13.744,46.175
  other v1: 61.775,36.83 61.775,37.379 61.775,37.928 61.775,38.477 61.775,39.027 61.775,39.576
5V: BT1.4 C8.1 C22.2 C34.2 F1.2 L3.1 R1.1 R22.1 R23.1 R24.1 U2.1 U2.3 U6.3 U6.4 U6.42 U7.6 U7.8 | length 143.7
  Top Layer w0.254: U6.42@64.475,17.325 v1(64.475,18.45) ; v2@64.525,19.926 cw(c64.525,19.625) 64.738,19.837 cw(c64.95,20.05) v2@64.649,20.05 ; v2@64.613,19.962 cw(c65.127,19.448) 65.127,20.175 ; U6.3@68.825,19.675 64.9,19.675 v2(64.525,20.05) 64.65,20.175 U6.4@68.825,20.175 ; F1.2@71.069,39.069 cw(c70.389,38.389) 71.35,38.389 cw(c72.311,38.389) F1.2@71.631,39.069 ; v6@71.227,37.873 ccw(c70.929,38.171) 71.35,38.171 ccw(c71.771,38.171) v6@71.473,37.873 ; v6(71.35,37.75) F1.2@71.35,39.7 ; R1.1@72.55,15.1 v2(76.35,15.1) ; R1.1@72.743,14.907 cw(c73.209,14.441) 73.209,15.1 cw(c73.209,15.759) R1.1@72.743,15.293 ; v2@76.262,15.012 ccw(c76.049,14.799) 76.049,15.1 ccw(c76.049,15.401) v2@76.262,15.188 ; v2@76.637,20.687 cw(c76.424,20.474) 76.725,20.474 cw(c77.026,20.474) v2@76.813,20.687 ; v2(76.725,20.775) 76.725,19.775 76.975,19.525 78.75,19.525 78.954,19.729 U7.6@78.954,20.791 ; 77.654,19.525 U7.8@77.654,20.791
  Top Layer w0.381: U2.1@67.629,40.825 71.075,40.825 ; U2.3@67.629,42.725 C8.1@71.35,42.725 71.35,40.825 ; L3.1@67.727,38.973 ccw(c67.369,39.331) 67.875,39.331 ccw(c68.381,39.331) L3.1@68.023,38.973 ; L3.1@67.875,38.825 U2.1@67.875,40.579 ; 67.875,40.129 cw(c68.775,40.129) U2.1@68.139,40.765 ; F1.2@71.075,39.975 71.075,40.825 ; C8.1@71.113,42.138 cw(c70.542,41.567) 71.35,41.567 cw(c72.158,41.567) C8.1@71.587,42.138 ; C8.1@71.113,42.488 ccw(c70.542,41.917) 70.542,42.725 ccw(c70.542,43.533) C8.1@71.113,42.962 ; F1.2@71.121,40.293 ccw(c70.62,40.825) 71.35,40.825 ; F1.2@71.35,39.7 71.35,40.825 ; F1.2@71.429,40.375 cw(c71.538,40.825) 71.075,40.825 ; F1.2@71.579,40.293 cw(c72.08,40.825) 71.35,40.825 ; 71.075,40.825 71.35,40.825
  Bottom Layer w0.254: BT1.4@49.65,10.555 55.205,10.555 55.575,10.925 55.575,16.275 55.9,16.6 64.2,16.6 64.475,16.875 v1(64.475,18.45) C22.2@64.475,19.35 ; BT1.4@49.911,10.294 cw(c50.541,9.664) 50.541,10.555 cw(c50.541,11.446) BT1.4@49.911,10.816 ; BT1.4@50.091,10.114 cw(c51.154,9.051) 51.154,10.555 cw(c51.154,12.059) BT1.4@50.091,10.996 ; C22.2@64.257,19.132 cw(c63.731,18.606) v1@64.475,18.606 ; C22.2@64.285,19.642 ccw(c64.033,19.975) v2@64.45,19.975 ; C22.2@64.37,19.678 cw(c64.771,19.57) v2@64.582,19.939 ; v1@64.41,18.487 ccw(c64.136,18.646) 64.442,18.728 ; C22.2@64.45,19.375 v2@64.45,19.975 ; C22.2@64.45,19.568 cw(c65.007,19.568) v2@64.613,19.962 ; 64.475,18.726 cw(c65.049,18.726) C22.2@64.643,19.132 ; 64.492,20.429 ccw(c64.904,20.429) v2@64.613,20.138 ; C22.2@64.615,19.642 cw(c64.867,19.975) v2@64.45,19.975 ; v6@71.227,37.627 cw(c70.929,37.329) 71.35,37.329 cw(c71.771,37.329) v6@71.473,37.627 ; 71.35,36.875 v6(71.35,37.75) ; v2@76.412,14.992 cw(c76.563,14.732) 76.64,15.022 cw(c76.718,15.313) v2@76.458,15.162 ; v2@76.438,15.012 cw(c76.651,14.799) 76.651,15.1 cw(c76.651,15.401) v2@76.438,15.188 ; 76.671,21.205 ccw(c77.155,21.205) 76.813,20.863 ccw(c76.987,21.037) 76.987,20.791 ; v2(76.725,20.775) 76.671,20.829 76.671,35.754 75.575,36.85 65.125,36.85 64.492,36.217 64.492,20.083 v2(64.525,20.05) v2@64.45,19.975 ; v2@76.741,20.791 C34.2@77.604,20.791 R24.1@77.604,14.954 ; v2@76.787,20.883 ccw(c77.008,21.266) 77.123,20.839 ; v2@76.796,20.673 cw(c77.042,20.319) 77.153,20.735 ; v2@76.813,20.687 cw(c77.064,20.436) 77.064,20.791 ; R24.1@76.982,14.785 ccw(c76.35,14.308) v2(76.35,15.1) R24.1@77.1,15.1 ; R24.1@77.107,15.143 ccw(c75.907,16.343) 77.604,16.343 ; R24.1@77.25,14.95 R23.1@78.65,14.95 R22.1@80,14.95 ; R24.1@77.287,14.963 ccw(c76.52,15.73) 77.604,15.73 ; C34.2@77.411,20.548 cw(c76.945,20.082) 77.604,20.082 cw(c78.263,20.082) C34.2@77.797,20.548 ; C34.2@77.411,20.598 ccw(c76.945,20.132) 76.945,20.791 ccw(c76.945,21.45) C34.2@77.411,20.984 ; R24.1@77.493,14.757 cw(c77.959,14.291) 77.959,14.95 cw(c77.959,15.609) R24.1@77.493,15.143 ; R23.1@78.407,14.757 ccw(c77.941,14.291) 77.941,14.95 ccw(c77.941,15.609) R23.1@78.407,15.143 ; R23.1@78.893,14.757 cw(c79.359,14.291) 79.359,14.95 cw(c79.359,15.609) R23.1@78.893,15.143 ; R22.1@79.757,14.757 ccw(c79.291,14.291) 79.291,14.95 ccw(c79.291,15.609) R22.1@79.757,15.143
50MHZ: U1.M12 XTAL1.3 | length 3.6
  Top Layer w0.381: U1.M12@44.2,29.3 45.3,29.3 45.725,29.726 XTAL1.3@45.725,31.625
AD0: U1.A2 U3.J6 U4.B6 | length 72.3
  Top Layer w0.102: U4.B6@10.975,22.706 cw(c10.975,22.478) 11.136,22.639 cw(c11.297,22.8) U4.B6@11.069,22.8 ; U4.B6@10.975,22.8 11.35,22.425 v1(11.35,22.3) ; U4.B6@11.004,22.771 cw(c10.533,22.3) v1@11.199,22.3 ; 11.178,22.597 cw(c10.88,22.3) v1@11.301,22.3 ; v1(12.825,16.4) 13.167,16.4 ; v1@12.936,16.298 cw(c13.167,16.087) 13.167,16.4 ; v1@12.936,16.502 ccw(c13.167,16.713) 13.167,16.4 ; U3.J6@20.952,21.427 cw(c20.654,21.129) 21.075,21.129 cw(c21.496,21.129) U3.J6@21.198,21.427 ; v1@20.968,16.293 ccw(c20.711,16.036) 20.711,16.4 ccw(c20.711,16.764) v1@20.968,16.507 ; v1@20.968,21.132 ccw(c20.711,21.389) 21.075,21.389 ccw(c21.439,21.389) v1@21.182,21.132 ; v1@20.981,21.143 ccw(c20.89,21.257) 21.031,21.294 ccw(c21.233,21.349) v1@21.141,21.161 ; v1@21.009,21.161 ccw(c20.917,21.349) 21.119,21.294 ccw(c21.26,21.257) v1@21.169,21.143 ; v1(21.075,16.4) 18.654,16.4 18.654,16.169 cw(c18.631,16.169) 18.631,16.146 18.448,16.146 cw(c18.448,16.169) 18.425,16.169 18.425,16.631 ccw(c18.402,16.631) 18.402,16.654 18.219,16.654 ccw(c18.219,16.631) 18.196,16.631 18.196,16.169 cw(c18.173,16.169) 18.173,16.146 17.991,16.146 cw(c17.991,16.169) 17.968,16.169 17.968,16.631 ccw(c17.945,16.631) 17.945,16.654 17.762,16.654 ccw(c17.762,16.631) 17.739,16.631 17.739,16.169 cw(c17.716,16.169) 17.716,16.146 17.533,16.146 cw(c17.533,16.169) 17.511,16.169 17.511,16.631 ccw(c17.488,16.631) 17.488,16.654 17.305,16.654 ccw(c17.305,16.631) 17.282,16.631 17.282,16.169 cw(c17.259,16.169) 17.259,16.146 17.076,16.146 cw(c17.076,16.169) 17.053,16.169 17.053,16.631 ccw(c17.03,16.631) 17.03,16.654 16.848,16.654 ccw(c16.848,16.631) 16.825,16.631 16.825,16.169 cw(c16.802,16.169) 16.802,16.146 16.619,16.146 cw(c16.619,16.169) 16.596,16.169 16.596,16.631 ccw(c16.573,16.631) 16.573,16.654 16.39,16.654 ccw(c16.39,16.631) 16.368,16.631 16.368,16.169 cw(c16.345,16.169) 16.345,16.146 16.162,16.146 cw(c16.162,16.169) 16.139,16.169 16.139,16.631 ccw(c16.116,16.631) 16.116,16.654 15.933,16.654 ccw(c15.933,16.631) 15.91,16.631 15.91,16.169 cw(c15.887,16.169) 15.887,16.146 15.705,16.146 cw(c15.705,16.169) 15.682,16.169 15.682,16.631 ccw(c15.659,16.631) 15.659,16.654 15.476,16.654 ccw(c15.476,16.631) 15.453,16.631 15.453,16.169 cw(c15.43,16.169) 15.43,16.146 15.247,16.146 cw(c15.247,16.169) 15.225,16.169 15.225,16.631 ccw(c15.202,16.631) 15.202,16.654 15.019,16.654 ccw(c15.019,16.631) 14.996,16.631 14.996,16.169 cw(c14.973,16.169) 14.973,16.146 14.79,16.146 cw(c14.79,16.169) 14.767,16.169 14.767,16.631 ccw(c14.744,16.631) 14.744,16.654 14.562,16.654 ccw(c14.562,16.631) 14.539,16.631 14.539,16.169 cw(c14.516,16.169) 14.516,16.146 14.333,16.146 cw(c14.333,16.169) 14.31,16.169 14.31,16.631 ccw(c14.287,16.631) 14.287,16.654 14.104,16.654 ccw(c14.104,16.631) 14.082,16.631 14.082,16.169 cw(c14.059,16.169) 14.059,16.146 13.876,16.146 cw(c13.876,16.169) 13.853,16.169 13.853,16.631 ccw(c13.83,16.631) 13.83,16.654 13.647,16.654 ccw(c13.647,16.631) 13.624,16.631 13.624,16.169 cw(c13.601,16.169) 13.601,16.146 13.419,16.146 cw(c13.419,16.169) 13.396,16.169 13.396,16.631 ccw(c13.373,16.631) 13.373,16.654 13.19,16.654 ccw(c13.19,16.631) 13.167,16.631 13.167,16.4 ; v1(21.075,21.025) U3.J6@21.075,21.55 ; v1@32.461,18.947 ccw(c32.461,19.311) 32.718,19.053 ccw(c32.976,18.796) v1@32.612,18.796 ; v1@32.5,18.942 ccw(c32.593,19.288) 32.772,18.977 ; v1@32.509,18.785 cw(c32.804,18.72) 32.642,18.975 ; v1@32.605,18.841 cw(c32.726,18.878) 32.658,18.985 ; v1@32.607,18.757 cw(c32.963,18.662) 32.779,18.981 ; v1@32.608,18.763 cw(c33.143,18.645) 32.848,19.107 ; 32.637,18.972 cw(c33.194,18.415) U1.A2@33.199,19.202 ; 32.809,19.144 cw(c33.196,18.756) U1.A2@33.2,19.304 ; U1.A2@33.199,19.101 ccw(c33.191,18.074) 32.465,18.8 32.965,19.3 U1.A2@33.2,19.3 ; v1@32.494,18.943 ccw(c32.533,19.119) 32.63,18.967 cw(c32.533,19.119) v1@32.494,18.943
  Bottom Layer w0.102: v1@11.243,22.193 cw(c10.986,21.936) 11.35,21.936 cw(c11.714,21.936) v1@11.457,22.193 ; v1(11.35,22.3) 11.35,18.9 12.2,18.05 12.2,16.675 12.475,16.4 ; v1@12.715,16.296 ccw(c12.475,16.069) 12.475,16.4 ; v1@12.715,16.504 cw(c12.475,16.731) 12.475,16.4 ; v1(12.825,16.4) 12.475,16.4 ; v1@20.968,16.507 ccw(c20.711,16.764) 21.075,16.764 ccw(c21.439,16.764) 21.182,16.507 ccw(c21.439,16.764) 21.439,16.4 ccw(c21.439,16.036) v1@21.182,16.293 ; v1@20.968,20.918 cw(c20.711,20.661) 21.075,20.661 cw(c21.439,20.661) v1@21.182,20.918 ; v1(21.075,21.025) v1(21.075,16.4) 22.037,16.4 cw(c22.037,16.377) 22.06,16.377 22.06,16.042 ccw(c22.083,16.042) 22.083,16.019 22.266,16.019 ccw(c22.266,16.042) 22.288,16.042 22.288,16.724 cw(c22.311,16.724) 22.311,16.747 22.494,16.747 cw(c22.494,16.724) 22.517,16.724 22.517,16.042 ccw(c22.54,16.042) 22.54,16.019 22.723,16.019 ccw(c22.723,16.042) 22.746,16.042 22.746,16.724 cw(c22.769,16.724) 22.769,16.747 22.951,16.747 cw(c22.951,16.724) 22.974,16.724 22.974,16.042 ccw(c22.997,16.042) 22.997,16.019 23.18,16.019 ccw(c23.18,16.042) 23.203,16.042 23.203,16.724 cw(c23.226,16.724) 23.226,16.747 23.409,16.747 cw(c23.409,16.724) 23.431,16.724 23.431,16.042 ccw(c23.454,16.042) 23.454,16.019 23.637,16.019 ccw(c23.637,16.042) 23.66,16.042 23.66,16.724 cw(c23.683,16.724) 23.683,16.747 23.866,16.747 cw(c23.866,16.724) 23.889,16.724 23.889,16.042 ccw(c23.912,16.042) 23.912,16.019 24.094,16.019 ccw(c24.094,16.042) 24.117,16.042 24.117,16.724 cw(c24.14,16.724) 24.14,16.747 24.323,16.747 cw(c24.323,16.724) 24.346,16.724 24.346,16.042 ccw(c24.369,16.042) 24.369,16.019 24.552,16.019 ccw(c24.552,16.042) 24.575,16.042 24.575,16.724 cw(c24.597,16.724) 24.597,16.747 24.78,16.747 cw(c24.78,16.724) 24.803,16.724 24.803,16.042 ccw(c24.826,16.042) 24.826,16.019 25.009,16.019 ccw(c25.009,16.042) 25.032,16.042 25.032,16.724 cw(c25.055,16.724) 25.055,16.747 25.237,16.747 cw(c25.237,16.724) 25.26,16.724 25.26,16.042 ccw(c25.283,16.042) 25.283,16.019 25.466,16.019 ccw(c25.466,16.042) 25.489,16.042 25.489,16.724 cw(c25.512,16.724) 25.512,16.747 25.695,16.747 cw(c25.695,16.724) 25.717,16.724 25.717,16.042 ccw(c25.74,16.042) 25.74,16.019 25.923,16.019 ccw(c25.923,16.042) 25.946,16.042 25.946,16.724 cw(c25.969,16.724) 25.969,16.747 26.152,16.747 cw(c26.152,16.724) 26.175,16.724 26.175,16.042 ccw(c26.198,16.042) 26.198,16.019 26.38,16.019 ccw(c26.38,16.042) 26.403,16.042 26.403,16.37 26.433,16.4 32.3,16.4 32.461,16.561 v1(32.461,18.796) ; v1@32.355,18.689 cw(c32.097,18.432) 32.461,18.432 cw(c32.825,18.432) v1@32.568,18.689
AD1: U1.A3 U3.H6 U4.C5 | length 68.9
  Top Layer w0.102: U4.C5@10.225,23.456 cw(c10.225,23.228) 10.386,23.389 cw(c10.547,23.55) U4.C5@10.319,23.55 ; U4.C5@10.225,23.55 v1(10.6,23.175) ; v1@10.449,23.175 ccw(c10.085,23.175) 10.343,23.432 ccw(c10.6,23.69) v1@10.6,23.326 ; v1(11.825,16.95) 14.962,16.95 ccw(c14.962,16.973) 14.985,16.973 14.985,17.181 cw(c15.008,17.181) 15.008,17.204 15.191,17.204 cw(c15.191,17.181) 15.214,17.181 15.214,16.973 ccw(c15.236,16.973) 15.236,16.95 15.419,16.95 ccw(c15.419,16.973) 15.442,16.973 15.442,17.181 cw(c15.465,17.181) 15.465,17.204 15.648,17.204 cw(c15.648,17.181) 15.671,17.181 15.671,16.973 ccw(c15.694,16.973) 15.694,16.95 15.876,16.95 ccw(c15.876,16.973) 15.899,16.973 15.899,17.181 cw(c15.922,17.181) 15.922,17.204 16.105,17.204 cw(c16.105,17.181) 16.128,17.181 16.128,16.973 ccw(c16.151,16.973) 16.151,16.95 16.334,16.95 ccw(c16.334,16.973) 16.357,16.973 16.357,17.181 cw(c16.379,17.181) 16.379,17.204 16.562,17.204 cw(c16.562,17.181) 16.585,17.181 16.585,16.973 ccw(c16.608,16.973) 16.608,16.95 16.791,16.95 ccw(c16.791,16.973) 16.814,16.973 16.814,17.181 cw(c16.837,17.181) 16.837,17.204 17.019,17.204 cw(c17.019,17.181) 17.042,17.181 17.042,16.973 ccw(c17.065,16.973) 17.065,16.95 17.248,16.95 ccw(c17.248,16.973) 17.271,16.973 17.271,17.181 cw(c17.294,17.181) 17.294,17.204 17.477,17.204 cw(c17.477,17.181) 17.5,17.181 17.5,16.973 ccw(c17.522,16.973) 17.522,16.95 17.705,16.95 ccw(c17.705,16.973) 17.728,16.973 17.728,17.181 cw(c17.751,17.181) 17.751,17.204 17.934,17.204 cw(c17.934,17.181) 17.957,17.181 17.957,16.973 ccw(c17.98,16.973) 17.98,16.95 18.162,16.95 ccw(c18.162,16.973) 18.185,16.973 18.185,17.181 cw(c18.208,17.181) 18.208,17.204 18.391,17.204 cw(c18.391,17.181) 18.414,17.181 18.414,16.973 ccw(c18.437,16.973) 18.437,16.95 18.62,16.95 ccw(c18.62,16.973) 18.643,16.973 18.643,17.181 cw(c18.665,17.181) 18.665,17.204 18.848,17.204 cw(c18.848,17.181) 18.871,17.181 18.871,16.719 ccw(c18.894,16.719) 18.894,16.696 19.077,16.696 ccw(c19.077,16.719) 19.1,16.719 19.1,17.181 cw(c19.123,17.181) 19.123,17.204 19.305,17.204 cw(c19.305,17.181) 19.328,17.181 19.328,16.719 ccw(c19.351,16.719) 19.351,16.696 19.534,16.696 ccw(c19.534,16.719) 19.557,16.719 19.557,17.181 cw(c19.58,17.181) 19.58,17.204 19.763,17.204 cw(c19.763,17.181) 19.786,17.181 19.786,16.719 ccw(c19.808,16.719) 19.808,16.696 19.991,16.696 ccw(c19.991,16.719) 20.014,16.719 20.014,17.181 cw(c20.037,17.181) 20.037,17.204 20.22,17.204 cw(c20.22,17.181) 20.243,17.181 20.243,16.719 ccw(c20.266,16.719) 20.266,16.696 20.448,16.696 ccw(c20.448,16.719) 20.471,16.719 20.471,17.181 cw(c20.494,17.181) 20.494,17.204 20.677,17.204 cw(c20.677,17.181) 20.7,17.181 20.7,16.737 ccw(c20.723,16.737) 20.723,16.714 20.906,16.714 ccw(c20.906,16.737) 20.929,16.737 20.929,17.181 cw(c20.951,17.181) 20.951,17.204 21.134,17.204 cw(c21.134,17.181) 21.157,17.181 21.157,16.762 ccw(c21.18,16.762) 21.18,16.739 21.363,16.739 ccw(c21.363,16.762) 21.386,16.762 21.386,16.927 cw(c21.409,16.927) 21.409,16.95 ; v1@11.932,16.843 cw(c12.189,16.586) 12.189,16.95 cw(c12.189,17.314) v1@11.932,17.057 ; U3.H6@21.075,22.35 v1(21.725,22.35) ; U3.H6@21.198,22.227 cw(c21.496,21.929) 21.496,22.35 cw(c21.496,22.771) U3.H6@21.198,22.473 ; v1@21.618,22.243 ccw(c21.361,21.986) 21.361,22.35 ccw(c21.361,22.714) v1@21.618,22.457 ; v1@21.639,16.848 ccw(c21.409,16.639) 21.409,16.95 ; v1@21.639,17.052 cw(c21.409,17.261) 21.409,16.95 ; v1(21.75,16.95) 21.409,16.95 ; v1(32.207,20.168) 32.512,20.168 ; v1@32.327,20.076 cw(c32.512,19.935) 32.512,20.168 ; v1@32.327,20.259 ccw(c32.512,20.4) 32.512,20.168 ; U1.A3@33.059,20.159 ccw(c32.719,19.819) 32.719,20.3 ccw(c32.719,20.781) U1.A3@33.059,20.441 ; U1.A3@33.2,20.3 32.644,20.3 32.512,20.168
  Bottom Layer w0.102: v1@10.6,23.024 cw(c10.6,22.66) 10.857,22.918 cw(c11.115,23.175) v1@10.751,23.175 ; v1(10.6,23.175) 10.925,22.85 10.925,18.75 11.25,18.425 11.25,17.525 v1(11.825,16.95) ; v1@11.674,16.95 ccw(c11.31,16.95) 11.568,17.207 ccw(c11.825,17.465) v1@11.825,17.101 ; v1@21.618,22.243 cw(c21.301,21.926) 21.75,21.926 ; v1@21.643,17.057 ccw(c21.386,17.314) 21.75,17.314 ccw(c22.114,17.314) 21.857,17.057 ccw(c22.114,17.314) 22.114,16.95 ccw(c22.114,16.586) v1@21.857,16.843 ; v1(21.725,22.35) 21.75,22.35 v1(21.75,16.95) 29.477,16.95 29.477,16.603 29.705,16.603 29.705,17.297 29.934,17.297 29.934,16.603 30.162,16.603 30.162,17.297 30.391,17.297 30.391,16.603 30.62,16.603 30.62,17.297 30.848,17.297 30.848,16.603 31.077,16.603 31.077,16.95 31.631,16.95 31.674,16.993 31.674,17.259 31.298,17.259 31.298,17.488 32.055,17.488 32.055,17.716 31.318,17.716 31.318,17.945 32.055,17.945 32.055,18.174 31.318,18.174 31.318,18.402 32.055,18.402 32.055,18.631 31.318,18.631 31.318,18.86 32.055,18.86 32.055,19.088 31.318,19.088 31.318,19.317 32.055,19.317 32.055,19.545 31.318,19.545 31.318,19.774 32.016,19.774 32.016,20.002 31.674,20.002 31.674,20.117 31.725,20.168 v1(32.207,20.168) ; 21.75,22.046 cw(c22.029,22.046) v1@21.832,22.243 ; v1@32.101,20.061 ccw(c31.843,19.804) 31.843,20.168 ccw(c31.843,20.531) v1@32.101,20.274